# Altium PCB LV_PCB.PcbDoc
Units mm, origin at the board's own origin, x right, y up, seen from the top; angles counter-clockwise.
Board outline 35 x 35 mm, 4 copper layers (L1 (Sig), L2 (GND), L3 (GND, L4 (Sig)), stack 1.57 mm thick; 35 components, 27 nets, 172 pads, 103 vias.
Unrouted connection lines stored in the file: 1.
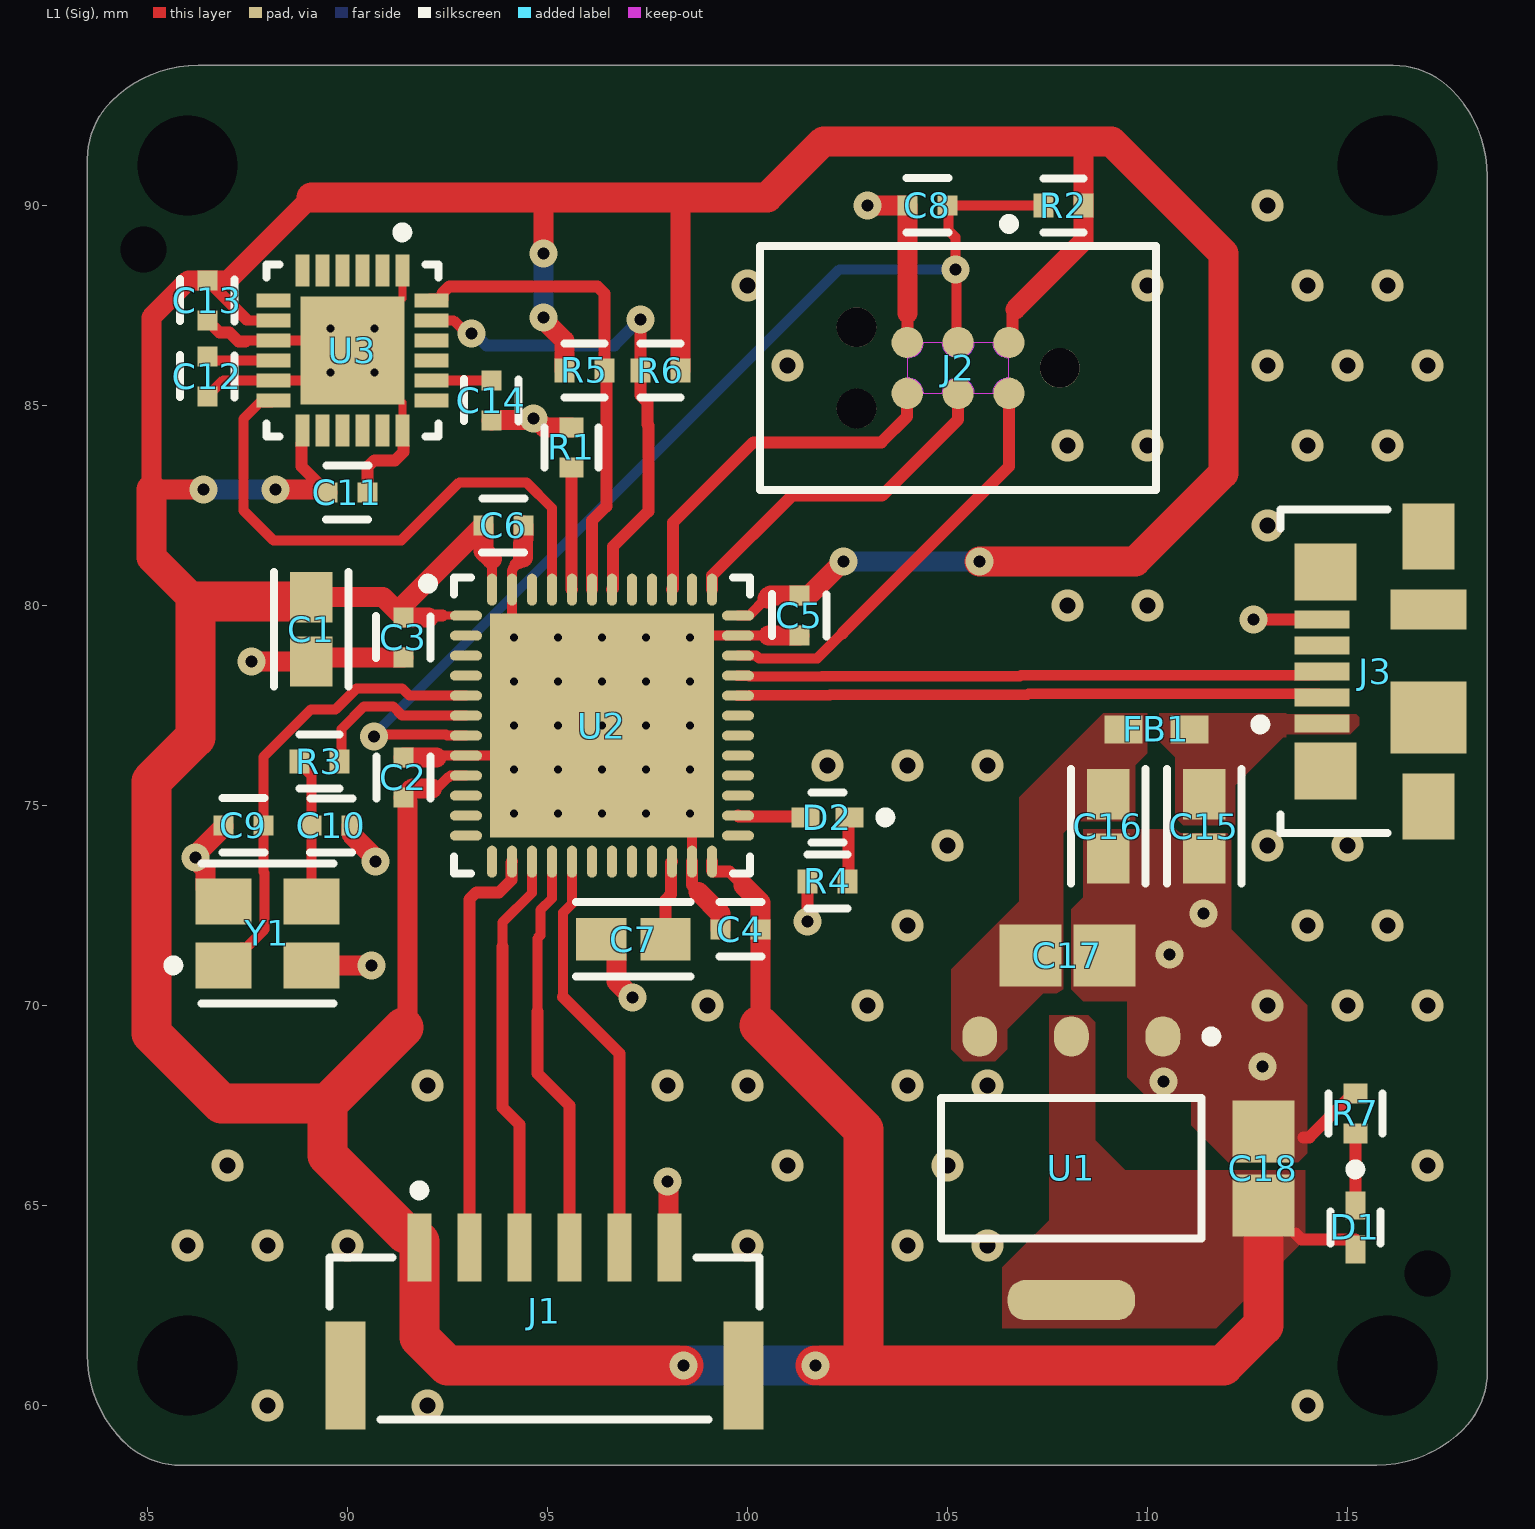
[diagram p0: L1 (Sig) view]
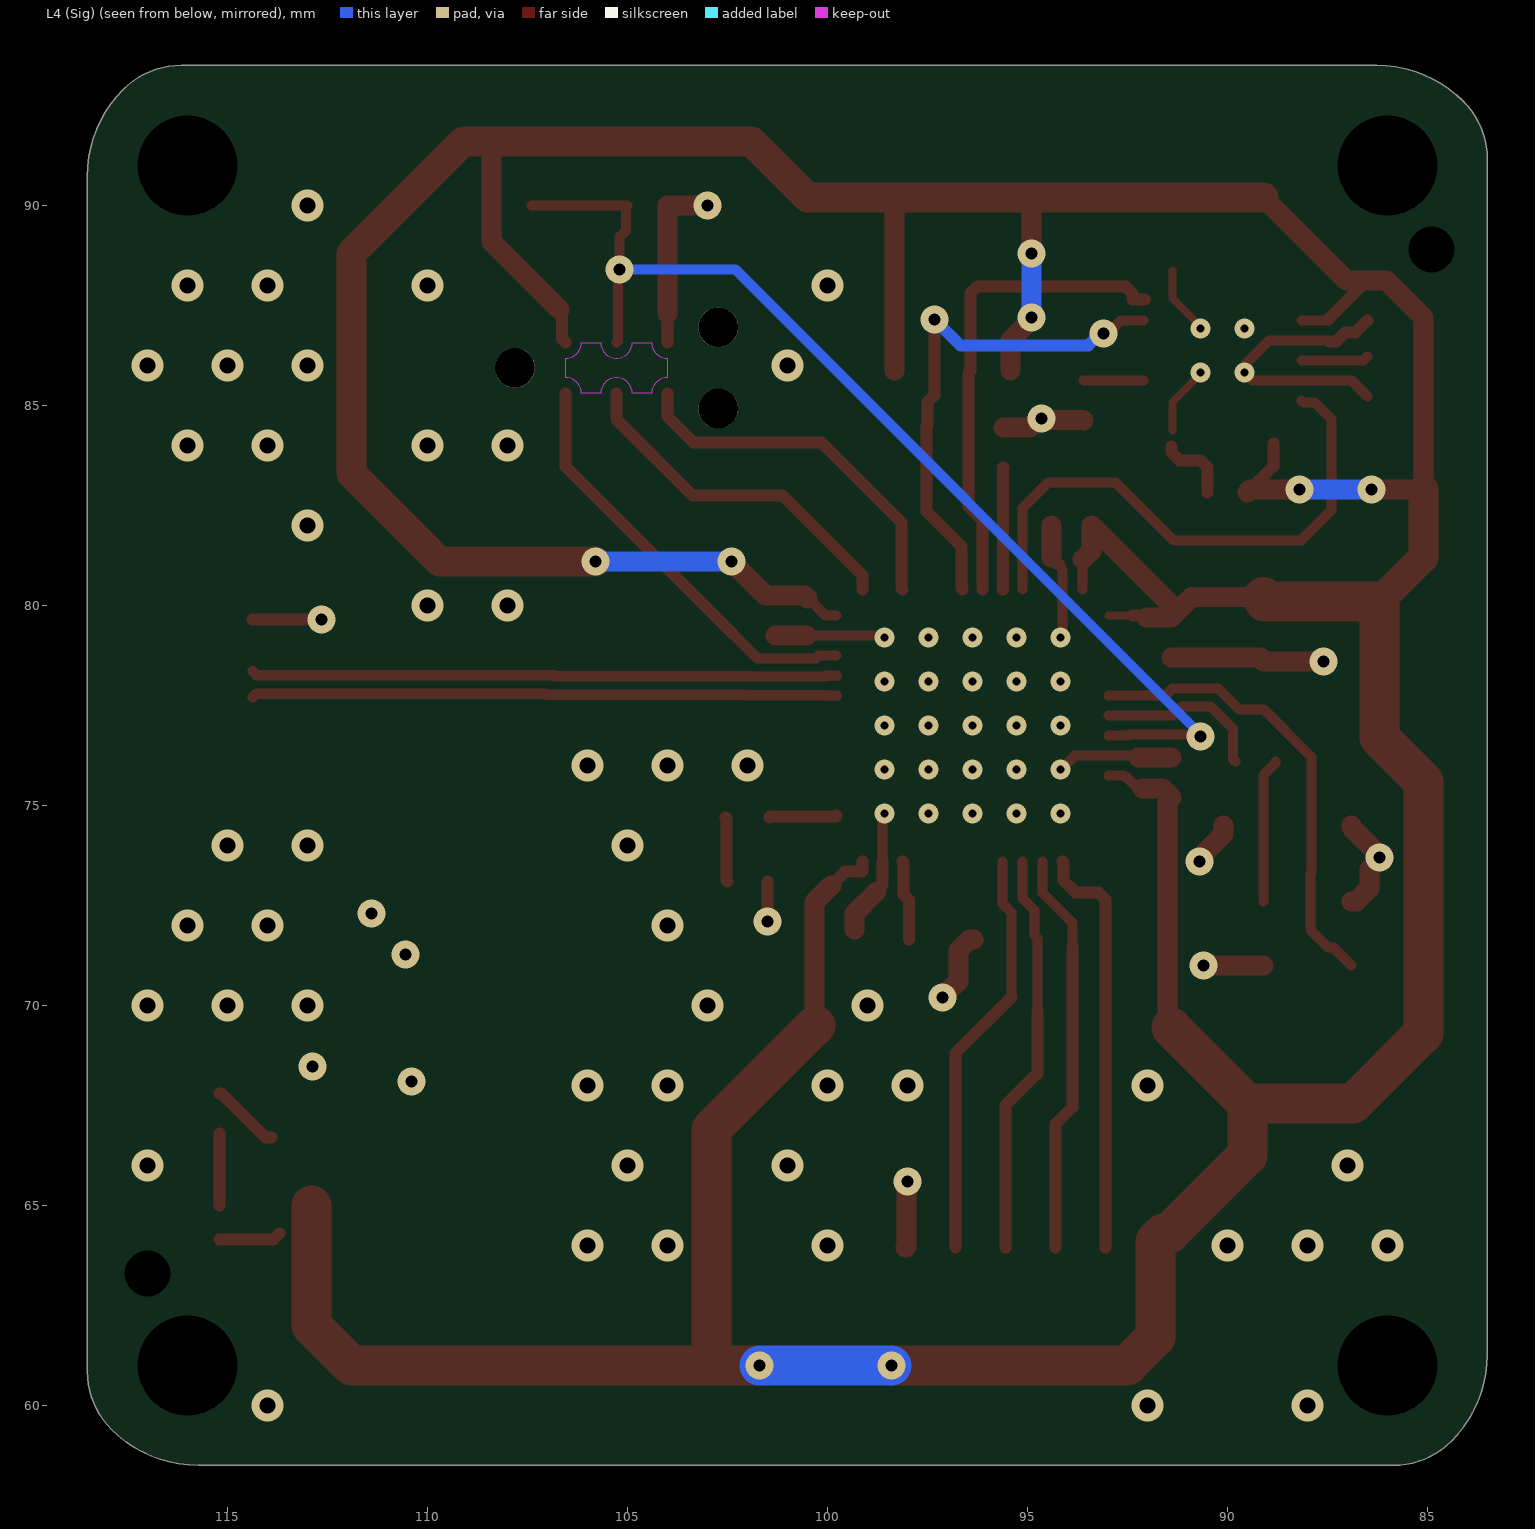
[diagram p1: L4 (Sig) view, seen from below]
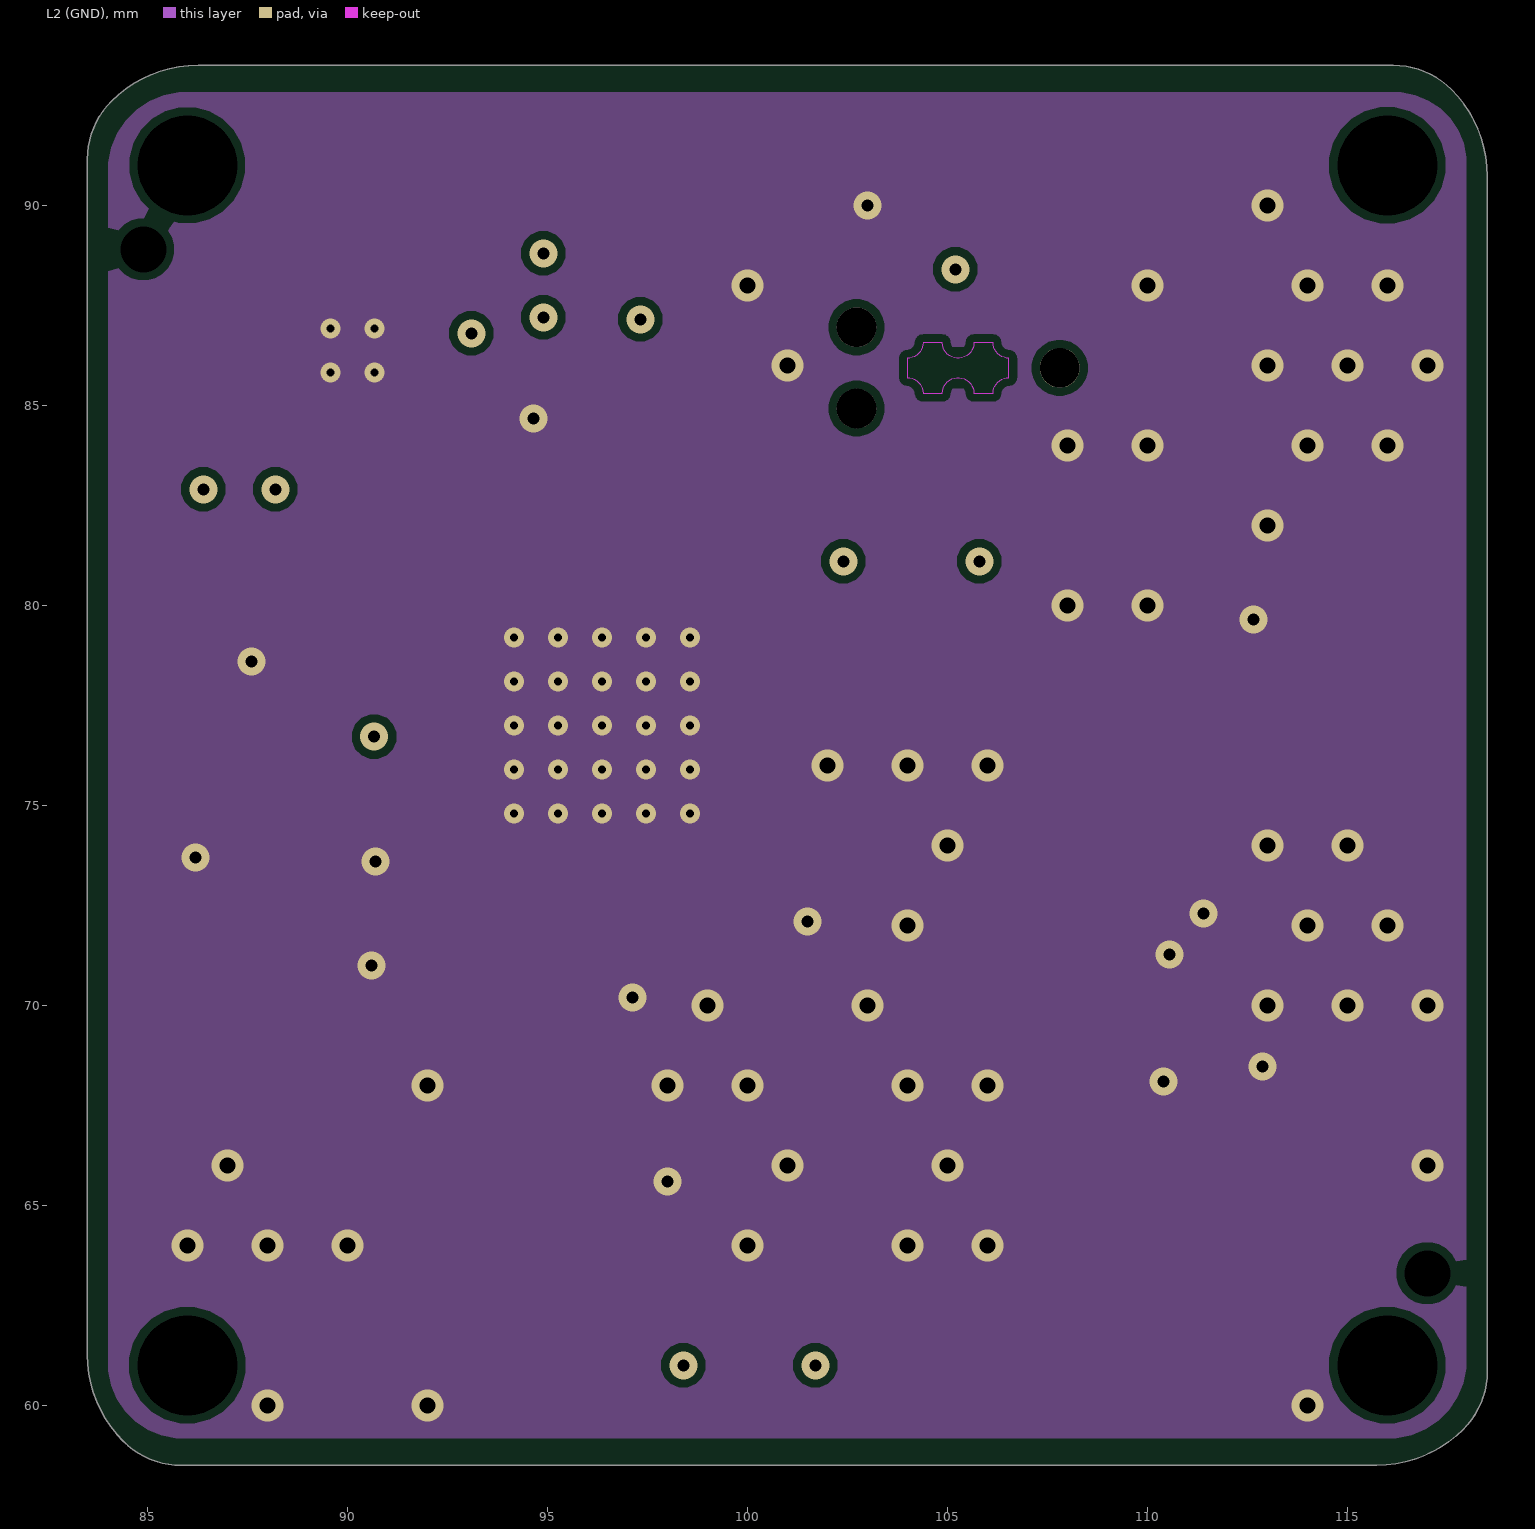
[diagram p2: L2 (GND)]
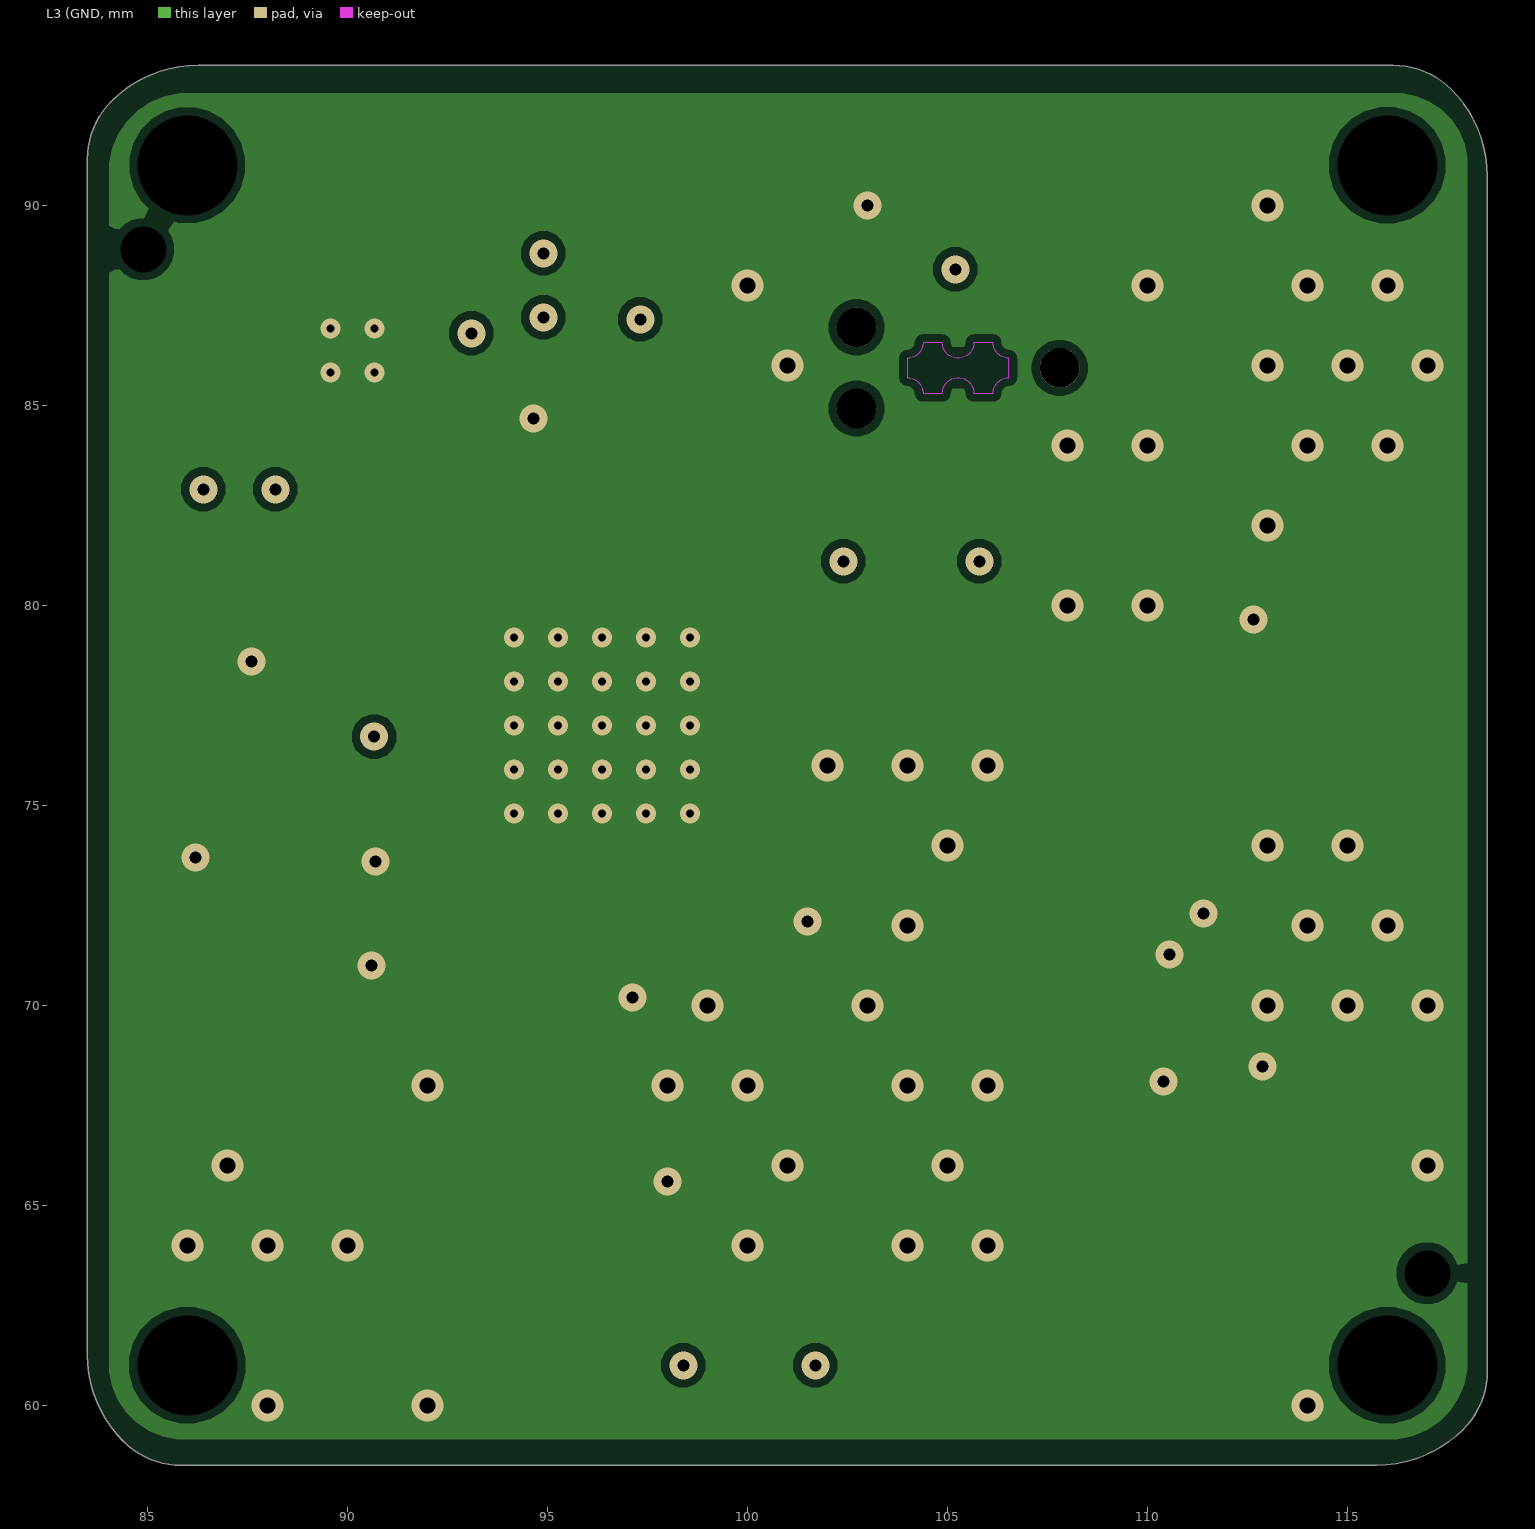
[diagram p3: L3 (GND]
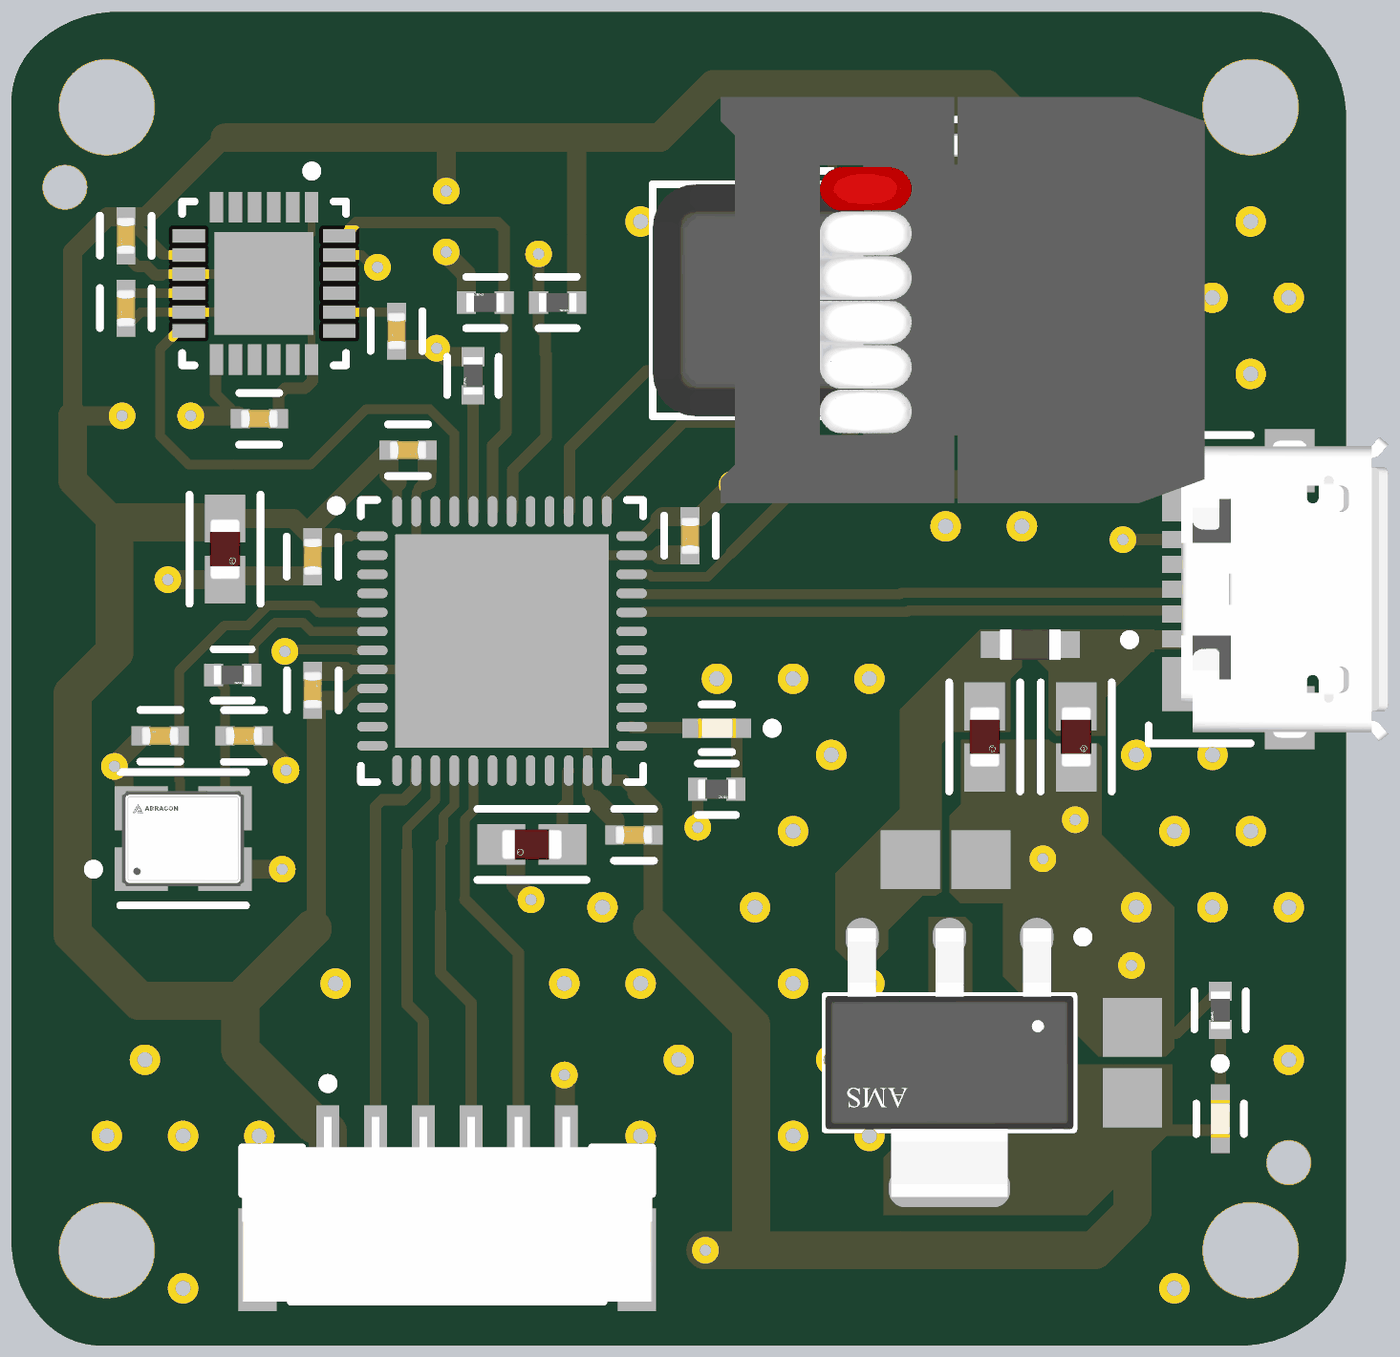
[diagram p4: 3D render of the assembled board from above, using the file's embedded part models]

## Layer stack, top to bottom
Top Solder: solder mask 0.0254, SM-001, Dk 4
L1 (Sig): signal copper 0.035
Dielectric 1: prepreg 0.2, PP-017, Dk 4.6
L2 (GND): signal copper 0.0175
Dielectric 3: core 1.065, Core-039, Dk 4.6
L3 (GND: signal copper 0.0175
Dielectric 5: prepreg 0.2, PP-017, Dk 4.6
L4 (Sig): signal copper 0.035
Bottom Solder: solder mask 0.0254, SM-001, Dk 4

## Board outline
83.5,61.27 83.5,91.149 cw(c85.555,91.149) 84.102,92.602 cw(c86.27,90.434) 86.27,93.5 116.149,93.5 cw(c116.149,91.445) 117.602,92.898 cw(c115.434,90.73) 118.5,90.73 118.5,60.851 cw(c116.445,60.851) 117.898,59.398 cw(c115.73,61.566) 115.73,58.5 85.851,58.5 cw(c85.851,60.555) 84.398,59.102 cw(c86.566,61.27)

## Design rules (kind name [scope] priority, off if disabled: settings)
Clearance [All] p1: gap=0.2 ignorepadtopadclearanceinfootprint=TRUE
DiffPairsRouting [All] p1: maxlimit=0.254 minlimit=0.203 mostfreqgap=0.254 toplayer_maxgap=0.203 toplayer_prefgap=0.203 toplayer_minwidth=0.26 toplayer_maxwidth=0.26 toplayer_prefwidth=0.26 bottomlayer_maxgap=0.203 bottomlayer_prefgap=0.203 bottomlayer_minwidth=0.26 bottomlayer_maxwidth=0.26 bottomlayer_prefwidth=0.26 impedanceprofiledriven=TRUE impedanceprofileid={E1D599B5-B481-4FDD-8B61-E9ACFA06A854} impedanceprofilevalue=90.000000 maxuncoupledlength=12.7
PolygonConnect [All] p1: connectstyle=Direct reliefconductorwidth=0.254 reliefentries=4 polygonreliefangle="90 Angle" airgapwidth=0.254
RoutingVias [All] p1: holewidth=0.3 width=0.7 viastyle="Through Hole" minholewidth=0.25 minwidth=0.55 maxholewidth=0.4 maxwidth=0.9
SolderMaskExpansion [All] p1: expansion=0 istentingtop=FALSE
SupplyNets "Schematic Supply Nets_3" [InNet('VBUS')] p1: voltage=0.000
SupplyNets "Schematic Supply Nets_2" [InNet('+3.3V')] p2: voltage=0.000
SupplyNets "Schematic Supply Nets_1" [InNet('GND')] p3: voltage=0.000
SupplyNets "Schematic Supply Nets" [InNet('+5')] p4: voltage=0.000
UnRoutedNet [All] p1: checkbadconnections=TRUE
Width [All] p1: maxlimit=1 minlimit=0.2 preferedwidth=0.3 midlayer1_minwidth=0.254 midlayer1_maxwidth=0.254 midlayer1_prefwidth=0.254 midlayer2_minwidth=0.254 midlayer2_maxwidth=0.254 midlayer2_prefwidth=0.254 minimp=50.000000 maximp=50.000000 favimp=50.000000
28 further rules are at their usual default settings.

## Classes and differential pairs
differential pair class DIFF_USB: USB_D
differential pair USB_D: +USB_D_P -USB_D_N

## Components (designator, comment, footprint, x,y, rotation, side; value= is the part's Value field where it differs from the comment)
C1 "2u2" FP-0603-L_1_6_0_15-W_0_8-IPC_A 89.1,79.4 r270 top
C2 "100n" FP-CC0402-MFG 91.4,75.7 r90 top value="100 nF"
C3 "100n" FP-CC0402-MFG 91.4,79.2 r270 top value="100 nF"
C4 "100n" FP-CC0402-MFG 99.825,71.9 r180 top value="100 nF"
C5 "100n" FP-CC0402-MFG 101.3,79.75 r270 top value="100 nF"
C6 "100n" FP-CC0402-MFG 93.9,82 r0 top value="100 nF"
C7 "2u2" FP-0603-L_1_6_0_15-W_0_8-IPC_A 97.15,71.65 r180 top
C8 "100n" FP-CC0402-MFG 104.5,90 r180 top value="100 nF"
C9 "10p" FP-CC0402-MFG 87.4,74.5 r180 top value="100 nF"
C10 "10p" FP-CC0402-MFG 89.6,74.5 r0 top value="100 nF"
C11 "100n" FP-CC0402-MFG 90,82.825 r0 top value="100 nF"
C12 "100n" FP-CC0402-MFG 86.5,85.725 r270 top value="100 nF"
C13 "10n" FP-CC0402-MFG 86.5,87.625 r270 top value="100 nF"
C14 "2n2" FP-CC0402-MFG 93.6,85.125 r270 top value="100 nF"
C15 "2u2" FP-0603-L_1_6_0_15-W_0_8-IPC_A 111.425,74.473 r270 top
C16 "2u2" FP-0603-L_1_6_0_15-W_0_8-IPC_A 109.025,74.473 r270 top
C17 "22u" CAPC2013X152X50ML20T25 108,71.25 r180 top
C18 "22u" CAPC2013X152X50ML20T25 112.9,65.925 r270 top
D1 "LED" FP-SML-LX0402SOC-TR-MFG 115.2,64.45 r270 top
D2 "LED" FP-SML-LX0402SOC-TR-MFG 102,74.7 r180 top
FB1 "120R" "WE-CBF HF_0603_HC" 110.225,76.9 r180 top
J1 "SM06B-GHS-TB(LF)(SN)" FP-SM06B-GHS-TB_LF_SN-MFG 94.925,61.675 r0 top
J2 "TC2030-CTX-NL" FP-TC2030-CTX-NL-MFG 105.27,85.935 r180 top
J3 "473460001" FP-473460001-MFG 116.675,78.35 r90 top
R1 "10k" FP-AC0402-MFG 95.6,83.95 r270 top
R2 "10k" FP-AC0402-MFG 107.9,90 r0 top
R3 "0 ohm" FP-AC0402-MFG 89.3,76.1 r0 top
R4 "1k" FP-AC0402-MFG 102,73.1 r0 top
R5 "2k2" FP-AC0402-MFG 95.925,85.875 r180 top
R6 "2k2" FP-AC0402-MFG 97.825,85.875 r0 top
R7 "1k" FP-AC0402-MFG 115.2,67.3 r270 top
U1 "AMS1117-3.3" FP-AMS1117-IPC_C 108.1,65.925 r270 top
U2 "STM32F411CEU6" STM-UFQFPN48_L 96.365,76.991 r0 top
U3 "MPU-6050" IS-QFN-24_V 90.125,86.375 r270 top
Y1 "24.0000MHZ" FP-ABM8W-MFG 88,71.8 r0 top

## Footprints (in the part's own frame and the unit in brackets; to place one, negate y for a bottom-side part, rotate by r counter-clockwise, add the part's x,y. Pads: shape width x height; smd on the part's side, far side on the other; paste and mask are expansions set on the pad)
CAPC2013X152X50ML20T25 [mm] "Chip Capacitor, 2-Leads, Body 2.01x1.25mm, IPC Low Density"
  rect 1.55x1.55 smd: 1(-0.925,0) 2(0.925,0)
  body extent -1.1,-0.72 1.11,0.72, height 1.52
FP-0603-L_1_6_0_15-W_0_8-IPC_A [mm]
  rect 1.258x1.062 smd paste+0 mask+0: 1(-0.802,0) 2(0.802,0)
  silkscreen extent -1.43,-0.93 1.43,0.93, body extent -1.93,-1.03 1.93,1.03, height 0.25
FP-473460001-MFG [mm]
  rect 0.45x1.38 smd paste+0 mask+0: 1(-1.3,2.31) 2(-0.65,2.31) 3(0,2.31) 4(0.65,2.31) 5(1.3,2.31)
  rect 1.425x1.55 smd paste+0 mask+0: 6(-2.488,2.225) 7(2.488,2.225)
  rect 1.65x1.3 smd paste+0 mask+0: 8(-3.375,-0.35) 11(3.375,-0.35)
  rect 1.8x1.9 smd paste+0 mask+0: 9(-1.15,-0.35)
  rect 1x1.9 smd paste+0 mask+0: 10(1.55,-0.35)
  silkscreen extent -4.05,0.67 4.05,3.97, body extent -4.3,-2.48 4.3,3.45, height 0.25
FP-ABM8W-MFG [mm]
  rect 1.4x1.15 smd paste+0 mask+0: 1(-1.1,-0.8) 2(1.1,-0.8) 3(1.1,0.8) 4(-1.1,0.8)
  silkscreen extent -2.47,-1.75 1.65,1.75, body extent -1.9,-1.48 1.9,1.48, height 0.25
FP-AC0402-MFG [mm]
  rect 0.5x0.6 smd paste+0 mask+0: 1(-0.5,0) 2(0.5,0)
  silkscreen extent -0.5,-0.67 0.5,0.67, body extent -0.85,-0.4 0.85,0.4, height 0.25
FP-AMS1117-IPC_C [mm]
  oval 1.004x0.872 smd paste+0 mask+0: 1(-3.295,2.29)
  rrect100% 1.004x0.872 smd paste+0 mask+0: 2(-3.295,0) 3(-3.295,-2.29)
  rrect87% 1.004x3.182 smd paste+0 mask+0: 4(3.295,0)
  silkscreen extent -3.42,-3.25 1.75,3.63, body extent -3.9,-3.35 3.9,3.35, height 0.25
FP-CC0402-MFG [mm]
  rect 0.5x0.5 smd paste+0 mask+0: 1(-0.5,0) 2(0.5,0)
  silkscreen extent -0.53,-0.68 0.53,0.67, body extent -0.87,-0.48 0.87,0.48, height 0.25
FP-SM06B-GHS-TB_LF_SN-MFG [mm]
  rect 0.6x1.7 smd paste+0 mask+0: 1(-3.125,2.275) 2(-1.875,2.275) 3(-0.625,2.275) 4(0.625,2.275) 5(1.875,2.275) 6(3.125,2.275)
  rect 1x2.7 smd paste+0 mask+0: 7(-4.975,-0.925) 8(4.975,-0.925)
  silkscreen extent -5.38,-2.02 5.38,3.82, body extent -5.58,-2.37 5.58,3.22, height 0.25
FP-SML-LX0402SOC-TR-MFG [mm]
  rect 0.7x0.5 smd paste+0 mask+0: 1(-0.55,0) 2(0.55,0)
  silkscreen extent -1.57,-0.63 0.4,0.63, body extent -1,-0.48 1,0.48, height 0.25
FP-TC2030-CTX-NL-MFG [mil]
  round 30.98 smd paste-39370.1 mask+0: 1(-50,-25) 2(-50,25) 3(0,-25) 4(0,25) 5(50,-25) 6(50,25)
  round 39.02 hole 39.02 unplated paste-99999 mask+0: ""(-100,0) ""(100,-40) ""(100,40)
  Keep-Out Layer region: -34.51,-25 -15.49,-25 -13.96,-18.28 -9.66,-12.89 -3.45,-9.9 3.45,-9.9 9.66,-12.89 13.96,-18.28 15.49,-25 15.49,-25 34.51,-25 35.69,-19.07 39.05,-14.05 44.07,-10.69 50,-9.51 50,-9.51 50,9.51 44.07,10.69 39.05,14.05 35.69,19.07 34.51,25 34.51,25 15.49,25 13.96,18.28 9.66,12.89 3.45,9.9 -3.45,9.9 -9.66,12.89 -13.96,18.28 -15.49,25 -15.49,25 -34.51,25 -35.69,19.07 -39.05,14.05 -44.07,10.69 -50,9.51 -50,9.51 -50,-9.51 -44.07,-10.69 -39.05,-14.05 -35.69,-19.07 -34.51,-25
  silkscreen extent -195,-147 195,120, body extent -199,-124 199,124, height 10
IS-QFN-24_V [mm] "QFN, 24-Leads, Body 4x4mm, Pitch 0.5mm, Thermal Pad 2.7x2.6mm"
  rect 0.8x0.35 smd: 1(-2,1.25) 2(-2,0.75) 3(-2,0.25) 4(-2,-0.25) 5(-2,-0.75) 6(-2,-1.25) 13(2,-1.25) 14(2,-0.75) 15(2,-0.25) 16(2,0.25) 17(2,0.75) 18(2,1.25)
  rect 0.35x0.85 smd mask+0.102: 7(-1.25,-1.975) 8(-0.75,-1.975) 9(-0.25,-1.975) 10(0.25,-1.975) 11(0.75,-1.975) 12(1.25,-1.975) 19(1.25,1.975) 20(0.75,1.975) 21(0.25,1.975) 22(-0.25,1.975) 23(-0.75,1.975) 24(-1.25,1.975)
  rect 2.7x2.6 smd: 25(0,0)
  silkscreen extent -3.07,-2.15 2.15,2.15, body extent -2,-2 2,2, height 0.95
STM-UFQFPN48_L [mm] "QFN, 48-Leads, Body 7.1x7.1mm, Pitch 0.5mm, Thermal Pad 5.6x5.6mm, IPC High Density"
  oval 0.8x0.25 smd: 1(-3.4,2.75) 2(-3.4,2.25) 3(-3.4,1.75) 4(-3.4,1.25) 5(-3.4,0.75) 6(-3.4,0.25) 7(-3.4,-0.25) 8(-3.4,-0.75) 9(-3.4,-1.25) 10(-3.4,-1.75) 11(-3.4,-2.25) 12(-3.4,-2.75) 25(3.4,-2.75) 26(3.4,-2.25) 27(3.4,-1.75) 28(3.4,-1.25) 29(3.4,-0.75) 30(3.4,-0.25) 31(3.4,0.25) 32(3.4,0.75) 33(3.4,1.25) 34(3.4,1.75) 35(3.4,2.25) 36(3.4,2.75)
  oval 0.25x0.8 smd: 13(-2.75,-3.4) 14(-2.25,-3.4) 15(-1.75,-3.4) 16(-1.25,-3.4) 17(-0.75,-3.4) 18(-0.25,-3.4) 19(0.25,-3.4) 20(0.75,-3.4) 21(1.25,-3.4) 22(1.75,-3.4) 23(2.25,-3.4) 24(2.75,-3.4) 37(2.75,3.4) 38(2.25,3.4) 39(1.75,3.4) 40(1.25,3.4) 41(0.75,3.4) 42(0.25,3.4) 43(-0.25,3.4) 44(-0.75,3.4) 45(-1.25,3.4) 46(-1.75,3.4) 47(-2.25,3.4) 48(-2.75,3.4)
  rect 5.6x5.6 smd: 49(0,0)
  silkscreen extent -4.47,-3.7 3.7,3.7, body extent -3.55,-3.55 3.55,3.55, height 0.6
"WE-CBF HF_0603_HC" [mm] "SMD EMI Suppression Ferrite  Bead, body 1.60x0.80mm"
  rect 0.95x0.7 smd: 1(-0.825,0) 2(0.825,0)
  body extent -0.8,-0.4 0.8,0.4, height 0.8

## Part data
C1 C7 C15 C16: library part CMP-2000-06225-3, "None", Capacitance=4.7uF, Case Code (Imperial)=0603, Case Code (Metric)=1608, Dielectric=X5R, Max Operating Temperature=85°C, Min Operating Temperature=-55°C, Package Quantity=1, Resistor Type=Ceramic, Tolerance=10%, Voltage Rating=16V, Case/Package=0603, Construction=Flat, Height=0.8mm, Length=1.6mm, Mount="Surface Mount", Number of Pins=2, Packaging="Tape and Reel", REACH SVHC="No SVHC", RoHS Compliant=Yes, Series=M, Termination=SMD/SMT, Thickness=0.035inch, Voltage Rating (DC)=16V, Width=0.8mm
C2 C3 C4 C5 C6 C8 C9 C10 C11 C12 C13 C14: library part CMP-03422-001312-1, "CAP CER 0.1UF 16V X5R 0402", Capacitance="100 nF", Manufacturer=YAGEO, Manufacturer Part Number=CC0402MRX5R7BB104, Package=CC0402, Temperature="-55°C to +125°C", Temperature Characteristic=X5R, Temperature Coefficient=30ppm/°C, Temperature Range High=+125°C, Temperature Range Low=-55°C, Tolerance=0.2, Voltage Rating="16 V", Automotive=No, Automotive Grade=NA, Category=Cap, ComponentLink2Description=Datasheet, ComponentLink2URL=http://www.yageo.com/documents/recent/UPY-GP_NP0_16V-to-50V_16.pdf, Device Class L1="Passive Components", Device Class L2=Capacitors, Device Class L3="Ceramic Capacitors", Digikey Description="CAP CER 0.1UF 16V X5R 0402", Footprint Url=http://www.yageo.com/exep/pages/download/literatures/UPY-C_GEN_24.pdf, Height=0.55mm, Ipc Land Pattern Name=CAPC10050X50, Lead Free=Yes, Material=Ceramic, Mouser Description="Multilayer Ceramic Capacitors MLCC - SMD/SMT 100nF 16V X5R 20%", Octopart=https://octopart.com/cc0402mrx5r7bb104-yageo-33242280, RoHS=TRUE
C17 C18: library part CMP-2007-04522-1, Manufacturer="AVX Interconnect / Elco", Part Number=0805ZD226MAT2A
D1 D2: library part CMP-57192-000002-1, "LED ORANGE CLEAR SMD", Case Code (Imperial)=0402, Case Code (Metric)=1005, Color=Orange, Forward Current=20mA, Forward Voltage=2V, Lens Color=Colorless, Max Operating Temperature=85°C, Min Operating Temperature=-40°C, Package Quantity=1, Case/Package=0402, Height=0.5mm, Illumination Color=Orange, Lead Free="Lead Free", Length=1mm, Lens Style=Clear, Lens Transparency=Clear, Luminous Intensity=120mcd, Mount="Surface Mount", Number of LEDs=1, Number of Pins=2, Packaging="Tape and Reel", Test Current=20mA, Viewing Angle=120°, Wavelength=610nm, Width=0.5mm
FB1: library part CMP-0220-00101-3, "Ferrite Bead (emi Suppression), 1.6X0.8X0.8MM (0603), 600O Impedance At 100 Mhz", Case Code (Imperial)=0603, Case Code (Metric)=1608, Case/Package=SMD/SMT, Current Rating=400mA, DC Resistance (DCR)=220mΩ, Max Current Rating=500mA, Max Operating Temperature=125°C, Min Operating Temperature=-55°C, Resistance=350mΩ, Test Frequency=100MHz, Tolerance=25%, Core Material=Ferrite, Depth=800µm, Height=800µm, Impedance=600Ω, Lead Free="Lead Free", Length=1.6mm, Max DC Current=500mA, Mount="Surface Mount", Number of Lines=1, Number of Pins=2, REACH SVHC=Unknown, RoHS=Compliant, Termination=SMD/SMT, Width=800µm
J1: library part CMP-17439-000061-1, "CONN HEADER SMD R/A 6POS 1.25MM", Color=Natural, Contact Resistance=50mR, Current Rating=1A, Housing Color=Beige, Max Operating Temperature=85°C, Max Voltage Rating (AC)=50V, Min Operating Temperature=-25°C, Connector Type="Outer Shroud Contact", Contact Material=Bronze, Contact Plating=Tin, Depth=4.05mm, Fastening Type=Ramp, Housing Material=Polyamide, Lead Free="Lead Free", Length=10.75mm, Max Current Rating=1A, Mount="Surface Mount", Number of Contacts=6, Number of Positions=6, Number of Rows=1, Orientation="Right Angle", Packaging="Tape and Reel", Pitch=1.25mm, Termination=Solder, Voltage Rating=50V
J2: library part CMP-205963-000001-1, "6-Pin “No legs” TC2030 Plug-of-Nails™ Cable for use with ARM Cortex processors"
J3: library part CMP-2000-05246-2, "CONN RCPT USB2.0 MICRO B SMD R/A", Current Rating=1.8A, Manufacturer=Molex, Package=0, Temperature="-30°C to +85°C", Temperature Range High=+85°C, Temperature Range Low=-30°C, Voltage Rating=30V, Automotive=No, Category=Conn, ComponentLink2Description=Datasheet, ComponentLink2URL=https://www.molex.com/webdocs/datasheets/pdf/en-us/0473460001_IO_CONNECTORS.pdf, Conn Orientation="Right Angle", Contact Material=Gold,Nickel, Device Class L1=Connectors, Device Class L2="USB Connectors", Device Class L3=unset, Digikey Description="CONN RCPT USB2.0 MICRO B SMD R/A", Footprint Url=https://www.molex.com/pdm_docs/sd/473460001_sd.pdf, Height=2.945mm, Is Female=yes, Lead Free=Yes, Manufacturer Part Number=473460001, Number of Contacts=5, Octopart=https://octopart.com/47346-0001-molex-7164928, Pitch=0.65mm, RoHS=TRUE, Shielding=true, Usb Standard="USB 2.0"
R1 R2 R3 R4 R5 R6 R7: library part CMP-03412-025001-2, "RES 11.3kΩ ±0.5% 0.063W 0402", RoHS Compliant=Yes
U1: library part CMP-209535-000001-1, "LDO Voltage Regulators 1A, 3.3V", Dropout Voltage=1.1V, Manufacturer="Advanced Monolithic Systems", Max Junction Temp=+125°C, Max Power Dissipation=1.2W, Max Supply Voltage=15V, Nominal Supply Current=5mA, Output Current=1A, Output Voltage=3.3V, Package=AMS1117, Temperature="-40°C to +125°C", Temperature Range Low=-40°C, Automotive=No, Category=IC, ComponentLink2Description=Datasheet, ComponentLink2URL=http://www.advanced-monolithic.com/pdf/ds1117.pdf, Device Class L1="Integrated Circuits (ICs)", Device Class L2="Power Management ICs", Device Class L3="Voltage Regulators - Linear", Height=1.8mm, Ipc Land Pattern Name=SOT229P700X180-4, Lead Free=Yes, Manufacturer Part Number=AMS1117-3.3, Number Of Outputs=1, Octopart=https://octopart.com/ams1117-3.3-advanced+monolithic+systems-25899300, Output Type=Fixed, RoHS=TRUE, Standoff Height=0.64mm, Temperature Range High=+125°C
U2: library part CMP-0243-00165-1, "ARM Cortex-M4 32-bit MCU+FPU, 512 KB Flash, 128 KB RAM, 36 I/Os, 48-Pin UFQFPN, -40 to 85 degC, Tray", I/Os (High Current)=36, Operating Frequency(F) (Processor speed) (MHz)=100, Package Description=UFQFPN48, Package Reference="48-Pin Ultra Thin Fine Pitch Quad Flat No-Lead, 7 x 7 x 0.6 mm Body, 0.5 mm Pitch, Exposed Pad", Supply Voltage(Vcc) min (V)=1.7, ComponentLink1Description="Manufacturer URL", ComponentLink1URL=http://www.st.com/, ComponentLink2Description=Datasheet, ComponentLink2URL=http://www.st.com/st-web-ui/static/active/en/resource/technical/document/datasheet/DM00115249.pdf, Core="ARM Cortex-M4", DatasheetVersion="Rev. 6", FLASH Size (Prog) (kB)=512, Internal RAM Size (kB)=128, Mounting Technology="Surface Mount", Packing=Tray
U3: library part CMP-1753-00002-2, "3-Axis Gyroscope, Accelerometer and a Digital Motion Processor(TM) (DMP), 2.375 to 3.46 V, -40 to 85 degC, 24-Pin QFN, RoHS, Tape and Reel", Manufacturer=InvenSense, Standard Package=5,000, Category=Sensors,Transducers, Datasheet URL=http://datasheet.octopart.com/MPU-6050-InvenSense-datasheet-14421344.pdf, Datasheet Version="Rev. 3.3, 05/2012", Dynamic Catalog=MPU-6000™Series, Family=Multifunction, Featured Product=MPU-60506-Axis,IntegratedI²CSolution, Manufacturer URL=http://www.invensense.com/, Online Catalog=MPU-6000™Series, Other Names="1428-1007-2 / MPU6050", Output Type=Digital, Sensor Type=MotionTracking, Unit PriceUSD=Digital
Y1: library part CMP-27762-013939-3, "Crystal 24MHz ±10ppm (Tol) ±10ppm (Stability) 7pF FUND 50Ω 4-Pin SMD T/R"

## Free pads (board coordinates)
  round 1.524 hole 2.5: 1(86,91) 2(116,91) 3(116,61) 4(86,61)
  round 0.5 hole 1.152: TH(84.9,88.9) TH(117,63.3)

## Via types
v1: diameter 0.8, hole 0.4, L1 (Sig) to L4 (Sig), 48 vias
v2: diameter 0.5, hole 0.2, L1 (Sig) to L4 (Sig), 29 vias
v3: diameter 0.7, hole 0.3, L1 (Sig) to L4 (Sig), 26 vias

## Nets (pads, with @x,y where several pads share a name; then routed paths per layer and width w, separated by ;. In a path a pad name is that pad's centre, name@x,y a point inside that pad or via, vN(x,y) a via of type N, cw(c..) or ccw(c..) an arc to the next point about the centre after c; other vN are vias at no path point)
+3.3V: C1.1 C2.1 C3.1 C4.1 C5.1 C6.1 C11.1 C13.1 C18.2 D1.2 J1.1 J2.1 R2.2 R5.2 R6.2 U1.2 U1.4 U2.1 U2.9 U2.24 U2.36 U2.48 U3.8 U3.13 | length 165.3
  L1 (Sig) w0.2: 92.375,79.75 92.956,79.75 U2.1
  L1 (Sig) w0.25: 87.475,87.15 87.5,87.125 U3.8 ; 92.115,75.425 92.119,75.429 92.241,75.429 92.504,75.691 92.529,75.691 92.579,75.741 U2.9 ; U2.48 93.615,81.158 ; U2.36 100.04,79.741 100.474,80.175 100.5,80.175
  L1 (Sig) w0.3: C13.1 87.475,87.15 ; U3.13@88.85,84.05 88.85,83.475 C11.1 ; 92.025,79.7 92.075,79.75 92.375,79.75 ; U2.24 99.115,73.366 99.14,73.341 99.559,73.341 99.9,73 ; J2.1 106.633,86.663 106.633,87.333 106.7,87.4 ; 113.7,64.3 113.85,64.15 D1.2@115.2,64.15
  L1 (Sig) w0.5: v3(86.4,82.9) 85.1,82.9 85.1,87.2 86.025,88.125 C13.1 87.025,88.125 89.1,90.2 ; v3(88.2,82.9) 89.425,82.9 C11.1 ; C1.1 90.898,80.202 91.149,79.951 ; 91.4,69.443 91.5,69.543 91.5,75.1 C2.1 91.625,75.425 92.115,75.425 ; 92.025,79.7 C3.1 91.149,79.951 ; 93.615,81.158 93.603,81.158 93.4,81.361 93.4,81.373 C6.1 91.351,79.951 91.149,79.951 ; v3(94.9,87.2) 94.9,87.146 95.425,86.621 R5.2 ; v3(94.9,88.8) 94.9,90.2 ; R6.2 98.325,90.131 ; 99.9,73 100.325,72.575 C4.1 100.325,69.525 100.3,69.5 ; 100.5,80.175 100.575,80.25 C5.1 101.55,80.25 v3(102.4,81.1) ; 106.7,87.4 108.4,89.1 R2.2@108.4,89.95 ; R2.2 108.4,91.6
  L1 (Sig) w0.75: 85.1,82.9 85.1,81.2 86.2,80.1 ; 89.1,90.2 94.9,90.2 98.256,90.2 ; 98.325,90.131 98.256,90.2 ; v3(105.8,81.1) 109.7,81.1 111.9,83.3 111.9,88.8 109.1,91.6 108.4,91.6 101.9,91.6 100.5,90.2 98.256,90.2
  L1 (Sig) w1: C1.1 89.1,80.131 89.069,80.1 86.2,80.1 86.2,76.7 85.1,75.6 85.1,69.3 86.857,67.543 89.5,67.543 ; 91.4,69.443 89.5,67.543 ; v3(98.4,61) 92.5,61 91.8,61.7 J1.1 91.8,64.1 91.6,64.3 91.45,64.3 89.5,66.25 89.5,67.543 ; 100.3,69.5 102.9,66.9 102.9,61 ; v3(101.7,61) 102.9,61 ; C18.2 112.9,62 111.9,61 102.9,61
  L4 (Sig) w0.5: v3(86.4,82.9) v3(88.2,82.9) ; v3(94.9,87.2) v3(94.9,88.8) ; v3(102.4,81.1) v3(105.8,81.1)
  L4 (Sig) w1: v3(98.4,61) v3(101.7,61)
+5: C16.1 C17.2 FB1.2 U1.3
CRYSTAL_IN: C10.1 R3.1 Y1.3 | length 3.6
  L1 (Sig) w0.25: R3.1 88.8,76.05 89.1,75.75 C10.1 Y1.3
GND: C1.2 C2.2 C3.2 C4.2 C5.2 C6.2 C7.2 C8.2 C9.2 C10.2 C11.2 C12.2 C13.2 C14.2 C15.2 C16.2 C17.1 C18.1 J1.6 J2.5 J3.5 R1.1 R4.1 R7.1 U1.1 U2.8 U2.23 U2.35 U2.47 U2.49 U3.1 U3.9 U3.11 U3.18 U3.25 Y1.2 Y1.4 | length 47.7
  L1 (Sig) w0.2: U3.25@90.675,85.775 91.375,85.075 U3.18 ; v2(90.675,86.925) 90.675,86.975 91.375,87.675 U3.1
  L1 (Sig) w0.25: C12.2 86.9,85.625 U3.11 89.375,85.625 v2(89.575,85.825) 89.575,86 88.95,86.625 U3.9 87.475,86.625 87.45,86.6 ; 92.225,76.2 92.266,76.241 U2.8 93.815,76.241 v2(94.165,75.891) ; v2(94.165,79.191) 94.115,79.241 U2.47 94.115,80.666 94.119,80.826 cw(c94.369,80.819) 94.143,80.926 ccw(c93.625,81.175) 94.149,80.939 cw(c94.377,80.836) 94.179,80.989 94.205,81.022 ; v2(98.565,74.791) 98.615,74.741 U2.23 ; v2(98.565,79.191) 98.615,79.241 U2.35 100.516,79.241 100.525,79.25
  L1 (Sig) w0.3: C13.2 86.8,86.825 87.05,86.825 87.275,86.6 87.45,86.6 ; C11.2 90.5,83.449 90.676,83.625 91.195,83.625 91.4,83.83 U3.18@91.4,83.975 ; 94.205,81.022 94.248,81.05 ccw(c94.248,81.197) 94.395,81.197 ; U2.23 98.615,73.003 98.784,72.834 ; v3(101.5,72.1) R4.1 ; J2.5 104,87.3 ; v3(112.65,79.65) J3.5 ; 113.9,66.7 114.05,66.7 115.15,67.8 R7.1
  L1 (Sig) w0.5: Y1.4 86.775,72.6 86.45,72.925 86.45,73.396 86.2,73.646 v3(86.2,73.7) 86.2,73.754 86.9,74.454 C9.2 ; v3(87.6,78.6) 87.602,78.598 C1.2 cw(c89.202,78.598) 89.202,78.7 C3.2 ; Y1.2 v3(90.6,71) ; C10.2 90.1,74.279 90.662,73.717 90.662,73.638 v3(90.7,73.6) ; C2.2 92.225,76.2 ; C14.2 93.612,84.637 94.612,84.637 v3(94.65,84.675) 94.704,84.675 94.929,84.45 R1.1 ; 94.395,81.197 C6.2 ; C7.2 96.446,71.65 96.727,71.369 96.727,70.598 v3(97.125,70.2) ; v3(98,65.6) 98.025,65.575 98.025,63.975 J1.6 ; 98.784,72.834 99.325,72.293 C4.2 ; 100.525,79.25 C5.2 ; v3(103,90) C8.2 104,87.3
  other v1: 88,60 92,60 114,60 86,64 88,64 90,64 100,64 104,64 106,64 87,66 101,66 105,66 117,66 92,68 98,68 100,68 104,68 106,68 99,70 103,70 113,70 115,70 117,70 104,72 114,72 116,72 105,74 113,74 115,74 102,76 104,76 106,76 108,80 110,80 113,82 108,84 110,84 114,84 116,84 101,86 113,86 115,86 117,86 100,88 110,88 114,88 116,88 113,90
  other v2: 94.165,74.791 95.265,74.791 96.365,74.791 97.465,74.791 95.265,75.891 96.365,75.891 97.465,75.891 98.565,75.891 94.165,76.991 95.265,76.991 96.365,76.991 97.465,76.991 98.565,76.991 94.165,78.091 95.265,78.091 96.365,78.091 97.465,78.091 98.565,78.091 95.265,79.191 96.365,79.191 97.465,79.191 90.675,85.825 89.575,86.925
  other v3: 110.4,68.1 112.875,68.475 110.55,71.275 111.4,72.3
IMU_CPOUT: C14.1 U3.20 | length 1.5
  L1 (Sig) w0.25: U3.20 C14.1
IMU_INT: U2.45 U3.12 | length 14.2
  L1 (Sig) w0.25: U3.12 88.1,85.075 87.817,85.075 87.4,84.658 87.4,82.375 88.15,81.625 91.35,81.625 92.8,83.075 94.475,83.075 95.115,82.435 U2.45
IMU_REGOUT: C12.1 U3.10 | length 1.7
  L1 (Sig) w0.25: C12.1 86.6,86.125 U3.10
IMU_SCL: R6.1 U2.42 U3.23 | length 13
  L1 (Sig) w0.25: U3.23 92.66,87.125 92.985,86.8 v3(93.1,86.8)
  L1 (Sig) w0.3: U2.42 96.64,80.416 96.64,81.465 97.525,82.35 97.525,84.5 97.5,84.525 97.5,85.075 97.325,85.25 R6.1 v3(97.325,87.15)
  L4 (Sig) w0.3: v3(93.1,86.8) 93.176,86.8 93.476,86.5 96.675,86.5 v3(97.325,87.15)
IMU_SDA: R5.1 U2.43 U3.24 | length 12.2
  L1 (Sig) w0.3: U3.24@92.063,87.65 92.375,87.65 92.375,87.799 92.551,87.975 96.249,87.975 96.425,87.799 R5.1 96.475,85.825 96.475,82.475 96.115,82.115 U2.43
LED_PWR_K: D1.1 R7.2 | length 1.8
  L1 (Sig) w0.3: D1.1 R7.2
MCU_BOOT0: R1.2 U2.44 | length 3.1
  L1 (Sig) w0.3: R1.2 95.607,83.443 95.607,80.399 U2.44
MCU_LED_A: D2.2 U2.26 | length 1.7
  L1 (Sig) w0.3: U2.26 99.786,74.721 101.429,74.721 D2.2
MCU_LED_K: D2.1 R4.2 | length 1.6
  L1 (Sig) w0.3: R4.2 102.525,73.125 102.525,74.675 D2.1
MCU_NRST: C8.1 J2.3 R2.1 U2.7 | length 27.7
  L1 (Sig) w0.25: v3(90.669,76.717) 90.727,76.775 92.463,76.775 92.497,76.741 U2.7 ; J2.3 105.235,86.605 105.235,88.365 v3(105.2,88.4) 105.2,89.204 105.029,89.375 105.029,89.971 C8.1 R2.1
  L4 (Sig) w0.25: v3(90.669,76.717) 90.669,76.769 102.3,88.4 v3(105.2,88.4)
MCU_OSC_IN: C9.1 U2.5 Y1.1 | length 11.6
  L1 (Sig) w0.25: Y1.1 87.35,71.45 87.485,71.45 87.925,71.89 87.925,73.31 87.9,73.335 C9.1 87.9,76.21 89.09,77.4 89.709,77.4 90.234,77.925 91.37,77.925 91.554,77.741 U2.5
MCU_OSC_OUT: R3.2 U2.6 | length 4.3
  L1 (Sig) w0.25: R3.2 89.853,76.153 89.853,76.908 90.42,77.475 91.139,77.475 91.373,77.241 U2.6
MCU_PA4: J1.2 U2.14 | length 10.4
  L1 (Sig) w0.3: J1.2 93.05,72.649 93.226,72.825 93.796,72.825 94.1,73.129 94.1,73.576 U2.14
MCU_PA5: J1.3 U2.15 | length 10.1
  L1 (Sig) w0.25: 93.875,71.475 93.875,72.07 94.615,72.81 U2.15
  L1 (Sig) w0.3: 93.875,71.475 93.875,67.451 94.3,67.026 J1.3
MCU_PA6: J1.4 U2.16 | length 10.1
  L1 (Sig) w0.25: 94.75,69.85 94.75,71.675 94.825,71.75 94.825,72.383 95.115,72.673 U2.16
  L1 (Sig) w0.3: 94.75,69.85 94.75,68.3 95.55,67.5 J1.4
MCU_PA7: J1.5 U2.17 | length 10.3
  L1 (Sig) w0.25: 95.394,70.206 95.394,72.316 95.615,72.537 U2.17
  L1 (Sig) w0.3: 95.394,70.206 96.8,68.8 J1.5
MCU_SWCLK: J2.4 U2.37 | length 8.8
  L1 (Sig) w0.3: U2.37 99.115,80.74 101.116,82.741 103.366,82.741 105.27,84.645 J2.4
MCU_SWDIO: J2.2 U2.34 | length 10.6
  L1 (Sig) w0.25: U2.34 100.221,78.741 100.287,78.675 101.75,78.675 102.375,79.3
  L1 (Sig) w0.3: 102.375,79.3 106.54,83.465 J2.2
MCU_SWO: J2.6 U2.39 | length 9.2
  L1 (Sig) w0.3: U2.39 98.14,80.416 98.14,82.065 100.148,84.073 103.348,84.073 103.991,84.716 103.991,85.291 J2.6
MCU_VCAP1: C7.1 U2.22 | length 2
  L1 (Sig) w0.3: C7.1 97.952,72.631 98.09,72.769 98.09,73.566 U2.22
USB_D_N: J3.2 U2.32 | length 14.7
  L1 (Sig) w0.26: U2.32 100.03,77.741 100.045,77.757 102.065,77.757 102.068,77.759 107.001,77.759 107.035,77.793 114.272,77.793 J3.2
USB_D_P: J3.3 U2.33 | length 14.7
  L1 (Sig) w0.26: U2.33 100.03,78.241 100.051,78.22 101.873,78.22 101.876,78.223 106.809,78.223 106.843,78.257 114.272,78.257 J3.3
VBUS: C15.1 FB1.1 J3.1
pads on no net: J1.7 J1.8 J2. J3.4 J3.6 J3.7 J3.8 J3.9 J3.10 J3.11 U2.2 U2.3 U2.4 U2.10 U2.11 U2.12 U2.13 U2.18 U2.19 U2.20 U2.21 U2.25 U2.27 U2.28 U2.29 U2.30 U2.31 U2.38 U2.40 U2.41 U2.46 U3.2 U3.3 U3.4 U3.5 U3.6 U3.7 U3.14 U3.15 U3.16 U3.17 U3.19 U3.21 U3.22

## Polygon pours and split planes (outlines as drawn)
GND on L1 (Sig) "GND_L01_P004" (solid, pour order 4): 108.1,72.4 108.4,72.7 108.4,74.4 111.9,74.4 112.1,74.2 112.1,71.9 114,70 114,66.3 113.7,66 112.1,66 111.1,67 111.1,67.6 110.1,67.6 109.5,68.2 109.5,70.1 108.4,70.1 108.1,70.4
+5 on L1 (Sig) "+5_L01_P005" (solid, pour order 5): 107.9,70.3 107.4,70.3 106.5,69.4 106.5,68.9 106.2,68.6 105.4,68.6 105.1,68.9 105.1,70.9 106.8,72.6 106.8,75.2 108.9,77.3 110,77.3 110,76.3 109.7,76 109.7,74.6 108.2,74.6 107.9,74.3 107.9,72.4
VBUS on L1 (Sig) "VBUS_L01_P003" (solid, pour order 3): 115,76.7 115.3,77 115.3,77.2 115.2,77.3 110.3,77.3 110.3,76.6 110.7,76.2 110.7,74.7 110.9,74.5 112.2,74.5 112.2,75.5 113.4,76.7
+3.3V on L1 (Sig) "+3.3V_L01_P000" (solid, pour order 0): 106.375,63.45 107.55,64.625 107.55,69.75 108.525,69.75 108.7,69.575 108.7,66.625 109.45,65.875 113.95,65.875 113.95,64.15 111.725,61.925 106.375,61.925
GND on L3 (GND "GND_L03_P002" (solid, pour order 2): 84.05,90.85 cw(c86,90.85) 86,92.8 116.2,92.8 cw(c116.2,91) 118,91 118,61.1 cw(c116.05,61.1) 116.05,59.15 85.925,59.15 cw(c85.925,61.025) 84.05,61.025
GND on L2 (GND) "GND_L02_P001" (solid, pour order 1): 84.025,90.875 cw(c85.975,90.875) 85.975,92.825 116.175,92.825 cw(c116.175,91.025) 117.975,91.025 117.975,61.125 cw(c116.025,61.125) 116.025,59.175 85.9,59.175 cw(c85.9,61.05) 84.025,61.05